# Altium PCB footprint_Chaveada_3.3V.PcbDoc
Units mm, origin at the board's own origin, x right, y up, seen from the top; angles counter-clockwise.
Board outline 18 x 10 mm, 2 copper layers (Top Layer, Bottom Layer); 11 components, 8 nets, 29 pads, 0 vias.
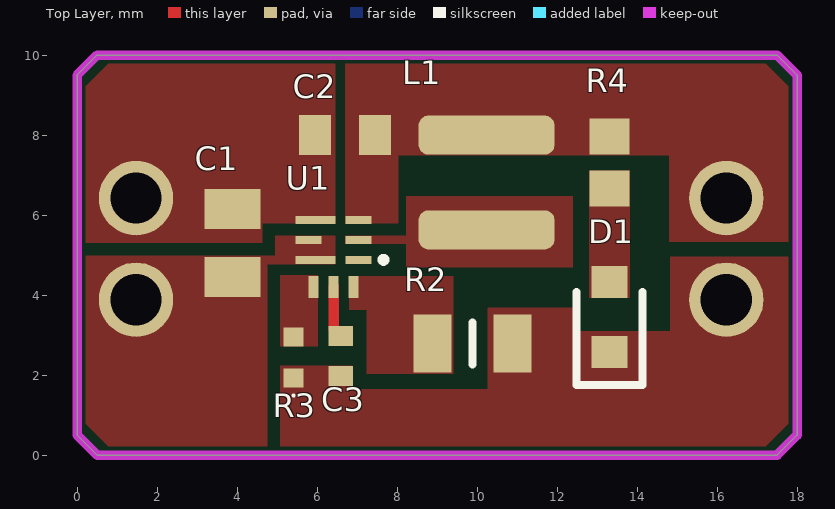
[diagram p0: Top Layer view]
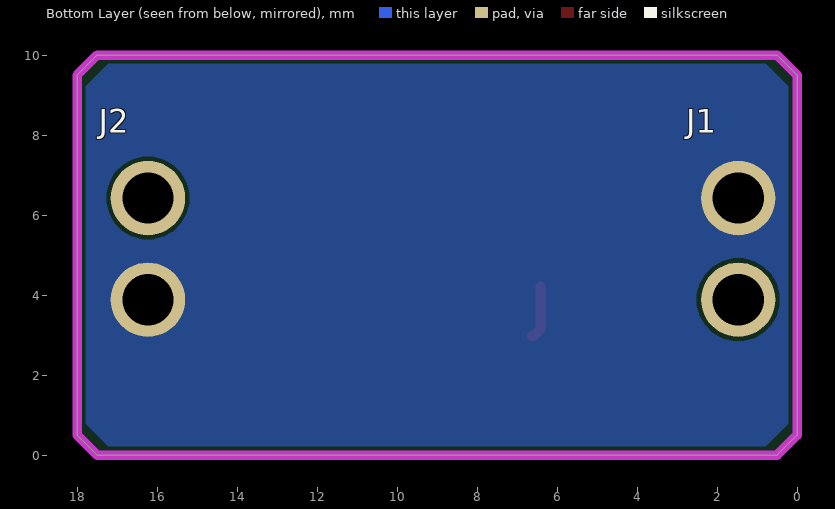
[diagram p1: Bottom Layer view, seen from below]

## Layer stack, top to bottom
Top Solder: solder mask 0.0102, Solder Resist, Dk 3.5
Top Layer: signal copper 0.0356
Dielectric 1: dielectric 0.32, FR-4, Dk 4.8
Bottom Layer: signal copper 0.0356
Bottom Solder: solder mask 0.0102, Solder Resist, Dk 3.5

## Board outline
0,9.5 0,0.5 0.5,0 17.5,0 18,0.5 18,9.5 17.5,10 0.5,10

## Design rules (kind name [scope] priority, off if disabled: settings)
Clearance [All] p1: gap=0.1 ignorepadtopadclearanceinfootprint=TRUE
MinimumSolderMaskSliver [All] p1: minsoldermaskwidth=0.1
PlaneClearance [All] p1: clearance=0.3
PlaneConnect [All] p1: planeconnectstyle=Direct reliefexpansion=0.508 reliefentries=4 reliefconductorwidth=0.254 reliefairgap=0.254
PolygonConnect [All] p1: connectstyle=Direct reliefconductorwidth=0.254 reliefentries=4 polygonreliefangle="90 Angle" airgapwidth=0.254
RoutingVias [All] p1: holewidth=0.711 width=1.27 viastyle="Through Hole" minholewidth=0.711 minwidth=1.27 maxholewidth=0.711 maxwidth=1.27
SilkToSilkClearance [All] p1: silktosilkclearance=0.1
SilkToSolderMaskClearance [IsPad] p1: minsilkscreentomaskgap=0.1 clearancetoexposedcopper=TRUE
SolderMaskExpansion [All] p1: expansion=0.102 istentingtop=FALSE soldermaskfromhole=TRUE
Width [All] p1: maxlimit=0.254 minlimit=0.254 preferedwidth=0.254
25 further rules are at their usual default settings.

## Components (designator, comment, footprint, x,y, rotation, side; value= is the part's Value field where it differs from the comment)
C1 "10uF" C0805 13.685,-12.838 r270 top
C2 "22uF" C0603 193.903,-65.387 r0 top
C3 "1nF" C0402 6.579,2.464 r90 top
D1 "Green" LED_0603 13.31,3.327 r90 top
J1 "Male Header 2" "MALE HEADER 2" 1.473,3.886 r90 bottom
J2 "Male Header 2" "MALE HEADER 2" 16.231,6.426 r270 bottom
L1 "2.2 uH" XAL0402 10.236,5.631 r90 top
R2 "249kR" RESISTOR_0805 9.881,2.794 r180 top
R3 "95.3kR" RESISTOR_0402 5.41,2.438 r90 top
R4 "100 R" RESISTOR_0603 13.31,7.315 r90 top
U1 "TPS62903RPJR" VQFN-HR-9 6.365,5.261 r0 top

## Footprints (in the part's own frame and the unit in brackets; to place one, negate y for a bottom-side part, rotate by r counter-clockwise, add the part's x,y. Pads: shape width x height; smd on the part's side, far side on the other; paste and mask are expansions set on the pad)
C0402 [mm]
  rect 0.5x0.62 smd: 1(-0.483,-0.01) 2(0.517,-0.01)
  body extent -0.51,-0.29 0.54,0.27, height 0.37
C0603 [mm]
  rect 0.8x1 smd: 1(-187.961,73.388) 2(-186.461,73.388)
  body extent -188.06,72.92 -186.36,73.82, height 0.8
C0805 [mm]
  rect 1x1.4 smd: 1(-18.985,-9.799) 2(-17.285,-9.799)
  body extent -19.21,-10.47 -17.06,-9.12, height 0.9
LED_0603 [mm]
  rect 0.8x0.9 smd: A(1.003,0) C(-0.75,0)
  silkscreen extent -1.58,-0.82 0.75,0.82, body extent -0.67,-0.4 0.93,0.4, height 0.7
"MALE HEADER 2" [mm]
  round 1.86 hole 1.28: PIN1(0,0) PIN2(2.54,0)
  body extent -1.27,-1.27 3.81,1.27, height 8
RESISTOR_0402 [mm]
  rect 0.475x0.5 smd: 1(-0.512,0) 2(0.512,0)
  silkscreen extent -0.97,-0.03 -0.93,0.03, body extent -0.5,-0.25 0.5,0.25, height 0.35
RESISTOR_0603 [mm]
  rect 0.9x1 smd: 1(-0.65,0) 2(0.65,0)
  body extent -0.8,-0.4 0.8,0.4, height 0.55
RESISTOR_0805 [mm]
  rect 0.95x1.45 smd: 1(-1,0) 2(1,0)
  silkscreen extent 0,-0.53 0,0.53, body extent -1.02,-0.63 1.02,0.63, height 0.5
VQFN-HR-9 [mm]
  rect 0.65x0.2 smd: EN(-0.574,0.123) PG(0.676,-0.377) SW(0.676,0.123) VOS(0.676,0.623)
  rect 0.25x0.55 smd: FB(0.551,-1.052) MODE(-0.449,-1.052) SS(0.051,-1.052)
  rect 1x0.2 smd: GND(-0.399,0.623) VIN(-0.399,-0.377)
  silkscreen extent 1.25,-0.43 1.35,-0.33, body extent -0.7,-1.13 0.8,0.87, height 1.1
XAL0402 [mm]
  rrect50% 0.98x3.4 smd: 1(0,0) 2(2.37,0)
  body extent -1.01,-2.15 3.29,2.15, height 2

## Part data
C1: library part C0805C106K8PACTU, "CAP CER 10uF 10V 10% X5R 0805", Manufacturer=KEMET, Operating Temperature="-55 C ~ 85 C", Package / Case="0805(2012 Metric)", Supplier Part Number 1=80-C0805C106K8P, Tolerance=10%, Voltage - Rated=10V, Category="Cereamic Capacitor", ComponentLink1Description=Datasheet, ComponentLink1URL=https://www.mouser.com/datasheet/2/212/KEM_C1006_X5R_SMD-1103249.pdf, ComponentLink2Description="Mouser Link", ComponentLink2URL=https://www.mouser.com/ProductDetail/KEMET/C0805C106K8PACTU?qs=Zpyg6gQUYs39C21BeavaKA%3D%3D, Dieletric=X5R, ESR=3mR, Library Control - Checked Footprint=-, Library Control - Checked Schematic=-, Library Control - Last Project that Used=-, Library Control - Last Update="14/07/2021 13:54", Library Control - Person that Checked Footprint=-, Library Control - Person that Checked Schematic=-, Library Control - Person that did the Last Update Footprint=Marcos, Library Control - Person that did the Last Update Schematic=Marcos, Library Ref=Capacitor, Part Number=C0805C106K8PACTU, Price="1=0,95, 10=0,632, 100=0,397, 1000=0,322 (USD)", Size / Dimension="2 L x 1,25 W x 1,25 H", Supplier 1=Mouser
C2: library part F980J226MMA, "CAP TAN 22uF 6.3V 0603", Manufacturer=AVX, Operating Temperature="-55 C ~ 125 C", Package / Case="0603 (1608 Metric)", Supplier Part Number 1=647-F980J226MMA, Tolerance=20%, Voltage - Rated=6.3V, Category="Tantalum Capacitor", ComponentLink1Description=Datasheet, ComponentLink1URL=https://br.mouser.com/datasheet/2/40/AVX_F98%20DTSH%2008_16-1158749.pdf, ComponentLink2Description="Mouser Link", ComponentLink2URL=https://br.mouser.com/ProductDetail/AVX/F980J226MMA?qs=%2Fha2pyFadujX%2FtPo6us3LKqC08nSC7LuR55MTleiyuYwEisNTuy1Qg%3D%3D, Dieletric=Tantalum, ESR="6 Ohms", Library Control - Checked Footprint=Yes, Library Control - Checked Schematic=Yes, Library Control - Last Update="27/06/2021 23:58", Library Control - Person that Checked Footprint=Nikaum, Library Control - Person that Checked Schematic=Nikaum, Library Control - Person that did the Last Update Footprint=Nikaum, Library Control - Person that did the Last Update Schematic=Nikaum, Library Ref=Capacitor, Part Number=F980J226MMA, Price="1 = 0,68, 10=0,478, 100=0,315 (USD)", Size / Dimension="1,60 L x 0,85 W x 0,80 H", Supplier 1=Mouser
C3: library part GRM155R61A102KA01D, "CAP CER 1nF 10V 10% X5R 0402", Manufacturer=Murata, Operating Temperature="-55 C ~ 85 C", Package / Case="0402 (1005 Metric)", Supplier Part Number 1=81-GRM155R61A102KA1D, Tolerance=10%, Voltage - Rated="10 VDC", Category="Cereamic Capacitor", ComponentLink1Description=Datasheet, ComponentLink1URL=https://www.mouser.com/datasheet/2/281/1/GRM155R61A102KA01_01A-1983865.pdf, ComponentLink2Description="Mouser Link", ComponentLink2URL=https://www.mouser.com/ProductDetail/Murata-Electronics/GRM155R61A102KA01D?qs=%2Fha2pyFadugsr51Fgcs3VAawZYh8F95Q8wbZYWKEskhTBdNn7s5FlndoImKM8CcX, Dieletric=X5R, ESR=1mR, Library Control - Checked Footprint=-, Library Control - Checked Schematic=-, Library Control - Last Project that Used=-, Library Control - Last Update="14/07/2021 14:02", Library Control - Person that Checked Footprint=-, Library Control - Person that Checked Schematic=-, Library Control - Person that did the Last Update Footprint=Marcos, Library Control - Person that did the Last Update Schematic=Marcos, Library Ref=Capacitor, Part Number=GRM155R61A102KA01D, Price="1=0,10, 10=0,029, 100=0,013, 1000=0,007 (USD)", Size / Dimension="1 L x 0,5 W x 0,5 H", Supplier 1=Mouser
D1: library part 150060VS75000, "LED 0.072W GREEN 40MCD 0603", Current - Forward (If)="20 mA", Manufacturer="Wurth Elektronik", Max Current Rating=100mA, Max Power Dissipation=72mW, Operating Temperature="-40~85 °C", Package / Case=0603, Reverse Voltage=5V, Supplier Part Number 1=710-150060VS75000, Voltage - Forward (Vf)="2 V", Category="Standard LEDs - SMD", Color=Green, ComponentLink1Description="Mouser Link", ComponentLink1URL=https://br.mouser.com/ProductDetail/Wurth-Elektronik/150060VS75000?qs=%2Fha2pyFaduhuT%2FKGSijZP0vTyJZ9U993KfsBQSxqATYhY9jnc2c09tXoMoJ3wn4L, ComponentLink2Description="Datasheet Link", ComponentLink2URL=https://br.mouser.com/datasheet/2/445/150060VS75000-1714627.pdf, Library Control - Checked Footprint=25/07/2021, Library Control - Checked Schematic=25/07/2021, Library Control - Last Project that Used=Diodo/Led, Library Control - Last Update="09/09/2021 16:12", Library Control - Person that Checked Footprint="Stéfany (Ster)", Library Control - Person that Checked Schematic="Stéfany (Ster)", Library Control - Person that did the Last Update Footprint="Stéfany (Ster)", Library Control - Person that did the Last Update Schematic=Marcos, Library Ref=LED, Luminous Intensity="40 mcd", Part Number=150060VS75000, Price="1 = 0.14, 50 = 0.133, 100 = 0.114 (USD)", Supplier 1=Mouser, Viewing Angle=140°, Wavelength=570nm
L1: library part XAL4020-222MEB, "IND FIX 2.2uH Shld 20% 5.5A 38.7mOhms AECQ2", Current Rating (Amps)="5.5 A", DC Resistance (DCR)="38.7 mOhms", Frequency - Self Resonant=-, Inductance Frequency - Test="1 MHz", Manufacturer=Coilcraft, Operating Temperature="- 40C ~ 125C", Package / Case=SMD/SMT, Part Number=XAL5030-332MEB, Supplier Part Number 1=994-XAL4020-222MEB, Tolerance="20 %", Category="Fixed Inductors", ComponentLink1Description=Datasheet, ComponentLink1URL=https://br.mouser.com/datasheet/2/597/xal50xx-270657.pdf, ComponentLink2Description="Mouser Link", ComponentLink2URL=https://br.mouser.com/ProductDetail/Coilcraft/XAL5030-332MEB?qs=VJjuEbE9QBML1BhYSWqvXA%3D%3D, Library Control - Checked Footprint=Yes, Library Control - Last Project that Used=-, Library Control - Last Update="07/10/2021 11:22", Library Control - Person that Checked Footprint=Nikaum, Library Control - Person that Checked Schematic=Nikaum, Library Ref=Inductor, Material - Core=Composite, Price="1=1,76, 10=1,75, 100=1,66 (USD)", Q @ Freq=-, Shielding=Shielded, Size / Dimension="4.3 mm x 4.3 mm x 2.1 mm", Supplier 1=Mouser, Type=Fixed
R2: library part CRCW0805249KFKEA, "RES SMD 249K OHM 1% 1/8W 0805", Manufacturer="Vishay / Dale", Operating Temperature="- 55ºC ~ 155ºC", Package / Case="0805 (2012 Metric)", Power Rating="125 mW (1/8 W)", Resistor Type=Fixo, Supplier Part Number 1=71-CRCW0805-249K-E3, Temperature Coefficient="100 PPM / C", Tolerance="1 %", Voltage Rating="150 V", Category="Thick Film Resistors - SMD", ComponentLink1Description="Mouser Link", ComponentLink1URL=https://www.mouser.com/ProductDetail/Vishay-Dale/CRCW0805249KFKEA?qs=%2Fha2pyFaduhkDOWkOJXWlGd1WMXaUgXuAgPdkVedxkHPM1mWPj6Q%2Fw%3D%3D, ComponentLink2Description="Datasheet Link", ComponentLink2URL=https://www.mouser.com/datasheet/2/427/dcrcwe3-1762152.pdf, Library Control - Checked Footprint=No, Library Control - Checked Schematic=Yes, Library Control - Last Update="21/06/21 15:40", Library Control - Person that Checked Schematic=Marcos, Library Control - Person that did the Last Update Footprint=Dalarme, Library Control - Person that did the Last Update Schematic=Marcos, Library Ref=Resistor, Part Number=CRCW0805249KFKEA, Price="1=0,18, 10=0,065, 100=0,027 1000=0,012 (USD)", Size / Dimension="2 mm L x  1.25 mm W x  0.45 mm H", Supplier 1=Mouser
R3: library part CRCW040295K3FKED, "RES SMD 95.3K OHM 1% 1/16W 0402", Manufacturer=Vishay, Operating Temperature="-55 C ~ 155 C", Package / Case="0402 (1005 Metric)", Power Rating="62,5mW (1/16 W)", Resistor Type=Fixo, Supplier Part Number 1=71-CRCW0402-95.3K-E3, Temperature Coefficient="100 PPM / C", Tolerance="1 %", Voltage Rating=50V, Category="Thick Film Resistors - SMD", ComponentLink1Description="Mouser Link", ComponentLink1URL=https://www.mouser.com/ProductDetail/Vishay-Dale/CRCW040295K3FKED?qs=lxmYmG9KtX%2FBpXlMXoZLjA%3D%3D, ComponentLink2Description="Datasheet Link", ComponentLink2URL=https://www.mouser.com/datasheet/2/427/dcrcwe3-1762152.pdf, Library Control - Last Update="13/07/21 22:10", Library Control - Person that did the Last Update Footprint=Marcos, Library Control - Person that did the Last Update Schematic=Marcos, Library Ref=Resistor, Part Number=CRCW040295K3FKED, Price="1 = 0,11, 10=0,04, 100=0,016, 1000=0,008 (USD)", Size / Dimension="1 L x 0,5 W x 0,35 H", Supplier 1=Mouser
R4: library part RC0603FR-10100RL, "RES SMD 100 OHM 1% 1/10W 0603", Manufacturer=Yageo, Operating Temperature="- 55 C~155 C", Package / Case="0603 (1608 metric)", Power Rating="100mW (1/10W)", Resistor Type=Fixo, Supplier Part Number 1=603-RC0603FR-10100RL, Temperature Coefficient="100 PPM / C", Tolerance="1 %", Voltage Rating="75 V", Category="Thick Film Resistors - SMD", ComponentLink1Description="Mouser Link", ComponentLink1URL=https://br.mouser.com/ProductDetail/Yageo/RC0603FR-10100RL/?qs=EiqXWrxQq62RG9T9SdQg0g==, ComponentLink2Description="Datasheet Link", ComponentLink2URL=https://br.mouser.com/datasheet/2/447/Yageo_03_18_2021_PYu_RC_Group_51_RoHS_L_11-2199992.pdf, Library Control - Checked Footprint=Yes, Library Control - Checked Schematic=Yes, Library Control - Last Update="27/06/2021 21:11", Library Control - Person that Checked Footprint=Nikaum, Library Control - Person that Checked Schematic=Nikaum, Library Control - Person that did the Last Update Footprint=Nicolas, Library Control - Person that did the Last Update Schematic=Nikaum, Library Ref=Resistor, Part Number=RC0603FR-10100RL, Price="1 = 0,10, 10 = 0,018, 100 = 0,006 (USD)", Size / Dimension="1,60 L x 0,80 W x 0,45 H", Supplier 1=Mouser
U1: "IC REG SWITCHING 3A 0.4V to 5.5V", Current - Operating Supply=-, Current - Output=3A, Frequency - Switching="1MHz to 2.5MHz", Manufacturer="Texas Instruments", Operating Temperature="-40~150 C", Package/Case=VQFN-HR-9, Supplier Part Number 1=595-TPS62903RPJR, Voltage - Input (Min)=3V, Voltage Output (Max)=5.5V, Voltage- Input (Max)=17V, Voltage- Output (Min/Fixed)=0.4V, Category="Switching Regulator", ComponentLink1Description="Mouser Link", ComponentLink1URL=https://www.mouser.com/ProductDetail/Texas-Instruments/TPS62903RPJR?qs=%2Fha2pyFadujoz9dD2iWmxEIG8wILTQB4UFbtSuHjz9jGVhTZ6FLd7w%3D%3D, ComponentLink2Description="Datasheet Link", ComponentLink2URL=https://www.ti.com/lit/ds/symlink/tps62903.pdf?ts=1626116449588&ref_url=https%253A%252F%252Fwww.ti.com%252Fproduct%252FTPS62903, Library Control - Person that did the Last Update Footprint=Marcos, Library Control - Person that did the Last Update Schematic=Marcos, Library Ref="Voltage Regulator", Max Power Dissipation=-, Number of Regulators=1, Output Type=Regulated, Part Number=TPS62903RPJR, Price="1=2.03 , 10=1,83 , 100=1,47 , 500=1,21 , 1000=1,01 (USD)", Supplier 1=Mouser, Voltage - Dropout (Max)=-
J1 J2: Library Control - Person that did the Last Update Schematic=Marcos, Library Control - Persont that did the Last Update Footprint=Marcos, Library Ref=Header, Number of Contacts=2, System=Connector

## Nets (pads, with @x,y where several pads share a name; then routed paths per layer and width w, separated by ;. In a path a pad name is that pad's centre, name@x,y a point inside that pad or via, vN(x,y) a via of type N, cw(c..) or ccw(c..) an arc to the next point about the centre after c; other vN are vias at no path point)
3.3V_Chaveado: C2.2 J2.PIN1 L1.2 R4.2 U1.VOS
5V: C1.2 J1.PIN1 U1.EN U1.VIN
GND: C1.1 C2.1 C3.1 D1.C J1.PIN2 J2.PIN2 R2.1 R3.1 U1.GND
NetC3_2: C3.2 U1.SS | length 1.4
  Top Layer w0.254: U1.SS 6.415,3.145 6.579,2.981 C3.2@6.639,2.981
NetD1_A: D1.A R4.1
NetL1_1: L1.1 U1.SW
NetR2_2: R2.2 U1.FB
NetR3_2: R3.2 U1.MODE
pads on no net: U1.PG

## Polygon pours and split planes (outlines as drawn)
NetL1_1 on Top Layer "NONET_L02_P-001" (solid, pour order 18): 6.706,5.283 8.23,5.283 8.23,4.699 12.395,4.699 12.395,6.477 8.23,6.477 8.23,5.486 6.706,5.486
3.3V_Chaveado on Top Layer "NONET_L02_P-001" (solid, pour order 17): 6.706,5.791 6.706,9.906 17.094,9.906 17.907,9.093 17.907,5.334 14.808,5.334 14.808,7.493 8.026,7.493 8.026,5.791
NetD1_A on Top Layer "NONET_L02_P-001" (solid, pour order 16): 12.802,7.112 12.802,3.937 13.818,3.937 13.818,7.112
GND on Top Layer "NONET_L02_P-001" (solid, pour order 15): 6.883,2.235 5.08,2.235 5.08,0.127 17.127,0.127 17.907,0.907 17.907,4.953 14.834,4.953 14.834,3.124 14.808,3.099 12.395,3.099 12.395,3.683 10.262,3.683 10.262,1.651 6.883,1.651
NetR2_2 on Top Layer "NONET_L02_P-001" (solid, pour order 13): 6.807,4.47 6.807,3.632 7.239,3.632 7.239,2.032 9.398,2.032 9.398,4.47
NetR3_2 on Top Layer "NONET_L02_P-001" (solid, pour order 8): 6.02,4.496 5.08,4.496 5.08,2.718 6.02,2.718
5V on Top Layer "Top Layer-5V" (solid, pour order 7): 0.873,0.127 4.75,0.127 4.75,4.775 6.452,4.775 6.452,5.486 4.953,5.486 4.953,4.978 0.127,4.978 0.127,0.873
GND on Top Layer "NONET_L02_P-001" (solid, pour order 5): 6.452,5.791 4.623,5.791 4.623,5.309 4.547,5.309 0.127,5.309 0.127,9.127 0.906,9.906 6.452,9.906
GND on Bottom Layer "NONET_L02_P-001" (solid, pour order 19): 0.127,9.127 0.127,0.873 0.873,0.127 17.127,0.127 17.907,0.907 17.907,9.093 17.094,9.906 0.906,9.906

## Keep-outs
Keep-Out Layer:
  the board outline again, w0.234